# EAGLE board CT_schematic (EAGLE 7.6.0)

Size 100 x 80 mm. Coordinates in mm from the lower left corner, seen from the top.
Outline: 0,0 100,0 100,80 0,80 0,0
Copper layers (1*16): Top 0.035mm / dielectric 1.5mm / Bottom 0.035mm
Design rules "default": minimum track width 10mil, minimum drill 24mil, track to track 8mil, track to pad 8mil, pad to pad 8mil, via to via 8mil, smd to smd 8mil, copper to edge 40mil, drill to drill 8mil, minimum pad ring 10mil, minimum via ring 8mil, stop-mask expansion 4mil, vias tented up to drill 0mil, thermal gap 10mil

## Footprints (pad centres in the part's own frame; a part is rotated, then mirrored left to right if it is on the bottom)
C0603 = smd 0.8 x 0.8: 1 -0.762,0; 2 0.762,0
C0402 = smd 0.5 x 0.5: 1 -0.508,0; 2 0.508,0
C1210 = smd 1.2 x 2.5: 1 -1.524,0; 2 1.524,0
C0805 = smd 1.2 x 1.3: 1 -1.016,0; 2 1.016,0
2220 = smd 1.85 x 5.5: 1 -2.55,0; 2 2.55,0
R0603 = smd 0.8 x 0.8: 1 -0.762,0; 2 0.762,0
EXV-9H = smd 3.505 x 1.676: 1 -2.857,0; 2 2.857,0
L0603 = smd 0.8 x 0.8: 1 -0.762,0; 2 0.762,0
DR1040 = smd 1.6 x 3.2: 1 -4.458,0; 2 4.458,0
PJ-037B_PACKAGE = drill 3.7 square: 1 12,0 | drill 3.2 square: 2 6,0
WLCSP64 = smd 0.34 x 0.34: A1 -1.75,1.75; A2 -1.25,1.75; A3 -0.75,1.75; A4 -0.25,1.75; A5 0.25,1.75; A6 0.75,1.75; A7 1.25,1.75; A8 1.75,1.75; B1 -1.75,1.25; B2 -1.25,1.25; B3 -0.75,1.25; B4 -0.25,1.25; B5 0.25,1.25; B6 0.75,1.25; B7 1.25,1.25; B8 1.75,1.25; C1 -1.75,0.75; C2 -1.25,0.75; C3 -0.75,0.75; C4 -0.25,0.75; C5 0.25,0.75; C6 0.75,0.75; C7 1.25,0.75; C8 1.75,0.75; D1 -1.75,0.25; D2 -1.25,0.25; D3 -0.75,0.25; D4 -0.25,0.25; D5 0.25,0.25; D6 0.75,0.25; D7 1.25,0.25; D8 1.75,0.25; E1 -1.75,-0.25; E2 -1.25,-0.25; E3 -0.75,-0.25; E4 -0.25,-0.25; E5 0.25,-0.25; E6 0.75,-0.25; E7 1.25,-0.25; E8 1.75,-0.25; F1 -1.75,-0.75; F2 -1.25,-0.75; F3 -0.75,-0.75; F4 -0.25,-0.75; F5 0.25,-0.75; F6 0.75,-0.75; F7 1.25,-0.75; F8 1.75,-0.75; G1 -1.75,-1.25; G2 -1.25,-1.25; G3 -0.75,-1.25; G4 -0.25,-1.25; G5 0.25,-1.25; G6 0.75,-1.25; G7 1.25,-1.25; G8 1.75,-1.25; H1 -1.75,-1.75; H2 -1.25,-1.75; H3 -0.75,-1.75; H4 -0.25,-1.75; H5 0.25,-1.75; H6 0.75,-1.75; H7 1.25,-1.75; H8 1.75,-1.75
SOIC-8 = smd 1.6 x 0.6: 1 -2.7,1.905 | smd 1.55 x 0.6: 2 -2.7,0.635; 3 -2.7,-0.635; 4 -2.7,-1.905; 5 2.7,-1.905; 6 2.7,-0.635; 7 2.7,0.635; 8 2.7,1.905
182-009-MALE = drill 1.194 pad 1.524 octagon: 1 -5.537,10.923; 2 -2.769,10.923; 3 0,10.923; 4 2.769,10.923; 5 5.537,10.923; 6 -4.153,8.08; 7 -1.384,8.08; 8 1.384,8.08; 9 4.153,8.08 | hole 3.048: -12.446,9.501; 12.446,9.501
QFN-32 = smd 0.6 x 0.3: 1 -2.3,1.75; 2 -2.3,1.25; 3 -2.3,0.75; 4 -2.3,0.25; 5 -2.3,-0.25; 6 -2.3,-0.75; 7 -2.3,-1.25; 8 -2.3,-1.75; 17 2.3,-1.75; 18 2.3,-1.25; 19 2.3,-0.75; 20 2.3,-0.25; 21 2.3,0.25; 22 2.3,0.75; 23 2.3,1.25; 24 2.3,1.75 | smd 0.3 x 0.6: 9 -1.75,-2.3; 10 -1.25,-2.3; 11 -0.75,-2.3; 12 -0.25,-2.3; 13 0.25,-2.3; 14 0.75,-2.3; 15 1.25,-2.3; 16 1.75,-2.3; 25 1.75,2.3; 26 1.25,2.3; 27 0.75,2.3; 28 0.25,2.3; 29 -0.25,2.3; 30 -0.75,2.3; 31 -1.25,2.3; 32 -1.75,2.3 | smd 3.2 x 3.2: EXP 0,0
SJ-43515TS-SMT-TR = smd 2.2 x 3: 1 0.6,-7.4; 4 3.4,-7.4 | smd 3 x 3: 2 12.8,-7.4; 5 17,-3 | smd 2 x 3: 3 5.3,0; 6 2.5,0 | drill 1.8: P$7 4.5,-3.69; P$8 11.54,-3.69
WM-64PC = drill 0.6 pad 1: 1 -1,0.95; 2 -1,-0.95
TSSOP20-I = smd 0.4 x 1.35: 1 -2.925,-2.875; 2 -2.275,-2.875; 3 -1.625,-2.875; 4 -0.975,-2.875; 5 -0.325,-2.875; 6 0.325,-2.875; 7 0.975,-2.875; 8 1.625,-2.875; 9 2.275,-2.875; 10 2.925,-2.875; 11 2.925,2.875; 12 2.275,2.875; 13 1.625,2.875; 14 0.975,2.875; 15 0.325,2.875; 16 -0.325,2.875; 17 -0.975,2.875; 18 -1.625,2.875; 19 -2.275,2.875; 20 -2.925,2.875
QFN-28 = smd 0.813 x 0.305: 1 -2.451,1.5; 2 -2.451,1; 3 -2.451,0.5; 4 -2.451,0; 5 -2.451,-0.5; 6 -2.451,-1; 7 -2.451,-1.5; 15 2.451,-1.5; 16 2.451,-1; 17 2.451,-0.5; 18 2.451,0; 19 2.451,0.5; 20 2.451,1; 21 2.451,1.5 | smd 0.305 x 0.813: 8 -1.5,-2.451; 9 -1,-2.451; 10 -0.5,-2.451; 11 0,-2.451; 12 0.5,-2.451; 13 1,-2.451; 14 1.5,-2.451; 22 1.5,2.451; 23 1,2.451; 24 0.5,2.451; 25 0,2.451; 26 -0.5,2.451; 27 -1,2.451; 28 -1.5,2.451 | smd 3.607 x 3.607: 29 0,0
ABS07-32.768KHZ-7-T = smd 1.1 x 2.4: 1 -2.5,0; 2 0,0
ABLS-12.288MHZ-B4-T = smd 5.6 x 2.8: 1 -3.81,0; 2 5.69,0
ASFL1 = smd 1.7 x 1.5: 1 -1.27,-1.1; 2 1.27,-1.1; 3 1.27,1.1; 4 -1.27,1.1
WSON-8 = smd 0.3 x 0.6: 1 -0.75,0; 2 0.05,0; 3 0.85,0; 4 1.65,0; 5 1.65,3.8; 6 0.85,3.8; 7 0.05,3.8; 8 -0.75,3.8 | smd 3 x 2.6: PAD 0.45,1.9
QFN-16_EP = smd 0.805 x 0.3: 1 -1.452,0.75; 2 -1.452,0.25; 3 -1.452,-0.25; 4 -1.452,-0.75; 9 1.452,-0.75; 10 1.452,-0.25; 11 1.452,0.25; 12 1.452,0.75 | smd 0.3 x 0.805: 5 -0.75,-1.452; 6 -0.25,-1.452; 7 0.25,-1.452; 8 0.75,-1.452; 13 0.75,1.452; 14 0.25,1.452; 15 -0.25,1.452; 16 -0.75,1.452 | smd 1.55 x 1.55: 17 0,0
SON-6 = smd 0.55 x 0.3: 1 -0.355,0.5 | smd 0.52 x 0.3: 2 -0.37,0; 3 -0.37,-0.5; 4 0.37,-0.5; 5 0.37,0; 6 0.37,0.5
SW_4-1437565-2 = smd 1.4 x 2.1: 1 -2.23,4.55; 2 -2.23,-4.55; 3 2.23,4.55; 4 2.23,-4.55
LGM67K-G1J2-24-Z = smd 0.8 x 1.4: A -2,0; C 0,0
NC7SZ125M5X = smd 1.3 x 0.7: 1 -1.3,0.95; 2 -1.3,0; 3 -1.3,-0.95; 4 1.3,-0.95; 5 1.3,0.95

## Placement (x,y rotation side)
C1  1e-06  [C0603]  -78.74,87.63 0 top  (outside the outline)
C2  1e-07  [C0603]  -82.55,87.63 0 top  (outside the outline)
C3  1e-07  [C0603]  -86.36,87.63 0 top  (outside the outline)
C4  1e-07  [C0603]  -90.17,87.63 0 top  (outside the outline)
C5  1e-07  [C0603]  -93.98,87.63 0 top  (outside the outline)
C6  4.7e-06  [C0603]  -74.93,87.63 0 top  (outside the outline)
C7  1e-07  [C0603]  -97.79,87.63 0 top  (outside the outline)
C8  1e-07  [C0603]  -101.6,87.63 0 top  (outside the outline)
C9  1e-08  [C0603]  -15.24,92.71 0 top  (outside the outline)
C10  1e-06  [C0603]  -19.05,92.71 0 top  (outside the outline)
C11  1e-11  [C0402]  -29.21,97.79 0 top  (outside the outline)
C12  1e-11  [C0402]  -33.02,97.79 0 top  (outside the outline)
C13  1e-08  [C0402]  -36.83,97.79 0 top  (outside the outline)
C14  1e-06  [C0603]  -22.86,92.71 0 top  (outside the outline)
C15  1e-06  [C0603]  -26.67,92.71 0 top  (outside the outline)
C16  1e-06  [C0603]  -30.48,92.71 0 top  (outside the outline)
C17  1e-06  [C0603]  -34.29,92.71 0 top  (outside the outline)
C18  1e-06  [C0603]  -38.1,92.71 0 top  (outside the outline)
C19  1e-06  [C0603]  -41.91,92.71 0 top  (outside the outline)
C20  1e-06  [C0603]  -45.72,92.71 0 top  (outside the outline)
C21  1e-06  [C0603]  -49.53,92.71 0 top  (outside the outline)
C22  1e-06  [C0603]  -53.34,92.71 0 top  (outside the outline)
C23  1e-07  [C0402]  -40.64,97.79 0 top  (outside the outline)
C24  1e-07  [C0402]  -44.45,97.79 0 top  (outside the outline)
C25  1e-07  [C0402]  -48.26,97.79 0 top  (outside the outline)
C26  1e-07  [C0402]  -52.07,97.79 0 top  (outside the outline)
C27  1e-06  [C0603]  -57.15,92.71 0 top  (outside the outline)
C28  1e-07  [C0402]  -55.88,97.79 0 top  (outside the outline)
C29  1e-07  [C0402]  -59.69,97.79 0 top  (outside the outline)
C30  1e-07  [C0402]  -63.5,97.79 0 top  (outside the outline)
C31  1e-07  [C0402]  -67.31,97.79 0 top  (outside the outline)
C32  1e-07  [C0402]  -71.12,97.79 0 top  (outside the outline)
C33  1e-07  [C0402]  -74.93,97.79 0 top  (outside the outline)
C34  2.2e-05  [C1210]  -99.06,74.93 0 top  (outside the outline)
C35  2.2e-05  [C1210]  -16.51,82.55 0 top  (outside the outline)
C36  1e-09  [C0402]  -78.74,97.79 0 top  (outside the outline)
C37  1e-09  [C0402]  -82.55,97.79 0 top  (outside the outline)
C38  1e-07  [C0402]  -86.36,97.79 0 top  (outside the outline)
C39  1e-07  [C0402]  -90.17,97.79 0 top  (outside the outline)
C40  1e-07  [C0402]  -93.98,97.79 0 top  (outside the outline)
C41  1e-07  [C0402]  -97.79,97.79 0 top  (outside the outline)
C42  1e-07  [C0402]  -101.6,97.79 0 top  (outside the outline)
C43  1e-05  [C0805]  -40.64,81.28 0 top  (outside the outline)
C44  1e-05  [C0805]  -45.72,81.28 0 top  (outside the outline)
C45  1e-05  [C0805]  -50.8,81.28 0 top  (outside the outline)
C46  1e-05  [C0805]  -55.88,81.28 0 top  (outside the outline)
C47  1e-05  [C0805]  -60.96,81.28 0 top  (outside the outline)
C48  2.2e-11  [C0402]  -21.59,97.79 0 top  (outside the outline)
C49  2.2e-11  [C0402]  -25.4,97.79 0 top  (outside the outline)
C50  1e-08  [C0402]  -15.24,102.87 0 top  (outside the outline)
C51  1e-08  [C0402]  -19.05,102.87 0 top  (outside the outline)
C52  1e-08  [C0402]  -22.86,102.87 0 top  (outside the outline)
C53  1e-05  [C1210]  -22.86,82.55 0 top  (outside the outline)
C54  1e-05  [C0805]  -66.04,81.28 0 top  (outside the outline)
C55  1e-05  [C0805]  -71.12,81.28 0 top  (outside the outline)
C56  1e-06  [C0603]  -60.96,92.71 0 top  (outside the outline)
C57  1e-07  [C0402]  -26.67,102.87 0 top  (outside the outline)
C58  6.8e-05  [2220]  -100.33,55.88 0 top  (outside the outline)
C59  8e-07  [R0603]  -64.77,92.71 0 top  (outside the outline)
C60  1e-05  [C1210]  -29.21,82.55 0 top  (outside the outline)
C61  1e-07  [C0402]  -30.48,102.87 0 top  (outside the outline)
C62  0.0001  [EXV-9H]  -17.78,74.93 0 top  (outside the outline)
C63  0.0001  [EXV-9H]  -29.21,74.93 0 top  (outside the outline)
C64  1e-08  [C0402]  -34.29,102.87 0 top  (outside the outline)
F1  240.0  [L0603]  -68.58,92.71 0 top  (outside the outline)
I1  7e-06  [DR1040]  -34.29,55.88 0 top  (outside the outline)
J1  PJ-037B  [PJ-037B_PACKAGE]  -83.82,43.18 0 top  (outside the outline)
R2  1000.0  [R0603]  -72.39,92.71 0 top  (outside the outline)
R4  4700.0  [R0603]  -76.2,92.71 0 top  (outside the outline)
R5  10000.0  [R0603]  -20.32,87.63 0 top  (outside the outline)
R6  10000.0  [R0603]  -25.4,87.63 0 top  (outside the outline)
R7  10000.0  [R0603]  -30.48,87.63 0 top  (outside the outline)
R8  10000.0  [R0603]  -35.56,87.63 0 top  (outside the outline)
R9  120.0  [R0603]  -80.01,92.71 0 top  (outside the outline)
R10  1270.0  [R0603]  -83.82,92.71 0 top  (outside the outline)
R11  1270.0  [R0603]  -87.63,92.71 0 top  (outside the outline)
R12  47000.0  [R0603]  -40.64,87.63 0 top  (outside the outline)
R13  47000.0  [R0603]  -45.72,87.63 0 top  (outside the outline)
R14  47000.0  [R0603]  -50.8,87.63 0 top  (outside the outline)
R15  680.0  [R0603]  -91.44,92.71 0 top  (outside the outline)
R16  100000.0  [R0603]  -76.2,81.28 0 top  (outside the outline)
R17  200.0  [R0603]  -95.25,92.71 0 top  (outside the outline)
R18  1000.0  [R0603]  -99.06,92.71 0 top  (outside the outline)
R19  20000.0  [R0603]  -55.88,87.63 0 top  (outside the outline)
R20  91000.0  [R0603]  -60.96,87.63 0 top  (outside the outline)
R21  300000.0  [R0603]  -81.28,81.28 0 top  (outside the outline)
R22  100000.0  [R0603]  -86.36,81.28 0 top  (outside the outline)
R23  300000.0  [R0603]  -91.44,81.28 0 top  (outside the outline)
R24  100000.0  [R0603]  -96.52,81.28 0 top  (outside the outline)
R25  10000.0  [R0603]  -66.04,87.63 0 top  (outside the outline)
R26  10000.0  [R0603]  -71.12,87.63 0 top  (outside the outline)
R27  9100.0  [R0603]  -102.87,92.71 0 top  (outside the outline)
R28  680000.0  [R0603]  -101.6,81.28 0 top  (outside the outline)
R29  120000.0  [R0603]  -15.24,87.63 0 top  (outside the outline)
U1  stm32f091rcy6  [WLCSP64]  -95.25,66.04 0 top  (outside the outline)
U2  AT25040B-SSHL-T  [SOIC-8]  -77.47,55.88 0 top  (outside the outline)
U3  MCP2562-E/SN  [SOIC-8]  -91.44,55.88 0 top  (outside the outline)
U4  182-009-113R531  [182-009-MALE]  -36.83,6.35 0 top  (outside the outline)
U5  SGTL5000XNAA3  [QFN-32]  -60.96,55.88 0 top  (outside the outline)
U6  SJ-43515TS-SMT-TR  [SJ-43515TS-SMT-TR]  -39.37,31.75 0 top  (outside the outline)
U7  SJ-43515TS-SMT-TR  [SJ-43515TS-SMT-TR]  -67.31,31.75 0 top  (outside the outline)
U8  SJ-43515TS-SMT-TR  [SJ-43515TS-SMT-TR]  -95.25,31.75 0 top  (outside the outline)
U9  WM-64PCT  [WM-64PC]  -46.99,55.88 0 top  (outside the outline)
U10  SP3203ECY-L/TR  [TSSOP20-I]  -24.13,55.88 0 top  (outside the outline)
U11  182-009-113R531  [182-009-MALE]  -76.2,6.35 0 top  (outside the outline)
U12  WM8731CLSEFL  [QFN-28]  -91.44,74.93 0 top  (outside the outline)
U13  SJ-43515TS-SMT-TR  [SJ-43515TS-SMT-TR]  -39.37,45.72 0 top  (outside the outline)
U14  SJ-43515TS-SMT-TR  [SJ-43515TS-SMT-TR]  -67.31,45.72 0 top  (outside the outline)
U15  ABS07-32.768KHZ-7-T  [ABS07-32.768KHZ-7-T]  -69.85,74.93 0 top  (outside the outline)
U16  ABLS-12.288MHZ-B4-T  [ABLS-12.288MHZ-B4-T]  -46.99,74.93 0 top  (outside the outline)
U17  ASFL-24.57MHZ-NCS  [ASFL1]  -66.04,66.04 0 top  (outside the outline)
U18  ASFL1-25MHZ-NCS  [ASFL1]  -82.55,66.04 0 top  (outside the outline)
U19  LP3878SDX-ADJ/NOPB  [WSON-8]  -30.48,64.77 0 top  (outside the outline)
U20  LTC3601EUD#PBF  [QFN-16_EP]  -15.24,97.79 0 top  (outside the outline)
U21  LP2951ACSDX/NOPB  [WSON-8]  -48.26,64.77 0 top  (outside the outline)
U22  TPS3895ADRYR  [SON-6]  -36.83,101.6 0 top  (outside the outline)
U23  4-1437565-2  [SW_4-1437565-2]  -100.33,43.18 0 top  (outside the outline)
U24  Q65110A2395  [LGM67K-G1J2-24-Z]  -78.74,74.93 0 top  (outside the outline)
U25  nc7sz125m5x  [NC7SZ125M5X]  -34.29,81.28 0 top  (outside the outline)

## Library data of the parts
C1-C64 F1 I1 J1 R2 R4-R29 U1-U25 = circuit_tree

## Nets
CLK_CRYSTAL_U1_C7: C11.1 U1.C7 U15.1
CLK_CRYSTAL_U1_C8: C12.1 U1.C8 U15.2
CLK_CRYSTAL_U12_1: C48.1 U12.1 U16.1
CLK_CRYSTAL_U12_2: C49.1 U12.2 U16.2
CLK_U1_D8: U1.D8 U18.3
CLK_U5_21: U5.21 U17.3
GND: C1.2 C2.2 C3.2 C4.2 C5.2 C6.2 C7.2 C8.2 C9.2 C10.2 C11.2 C12.2 C13.2 C14.2 C15.2 C23.2 C24.2 C25.2 C26.2 C27.2 C28.2 C29.2 C32.2 C33.2 C37.2 C38.2 C39.2 C40.2 C41.2 C42.2 C43.2 C44.2 C45.2 C46.2 C47.2 C48.2 C49.2 C50.2 C51.2 C52.2 C53.2 C54.2 C55.2 C56.2 C58.1 C58.2 C59.2 C60.2 C61.2 C62.2 C63.2 C64.2 J1.2 R2.2 R5.2 R11.2 R12.2 R13.2 R14.2 R18.2 R19.2 R21.2 R24.2 R27.2 R29.2 U1.A7 U1.B2 U1.G7 U1.G8 U1.H2 U2.4 U3.2 U3.8 U4.5 U5.1 U5.3 U5.7 U5.EXP U7.1 U8.1 U9.2 U10.18 U11.5 U12.4 U12.15 U12.19 U12.25 U12.26 U12.29 U13.1 U14.1 U17.2 U18.2 U19.3 U19.PAD U20.1 U20.9 U20.17 U21.3 U21.4 U21.PAD U22.2 U24.C U25.1 U25.3
NET_U1_C6: R5.1 U1.C6
NET_U1_D7: R4.1 U1.D7 U25.4
NET_U1_H5: U24.A
NET_U1_H7: U23.3 U23.4
NET_U1_H8: C9.1 C10.1 F1.1 U1.H8
NET_U2_3: R6.1 U2.3
NET_U2_7: R8.1 U2.7
NET_U3_6: R9.2 U3.6
NET_U4_2: R9.2 U3.6 U4.2
NET_U4_3: R9.1 U3.7 U4.3
NET_U5_10: C26.1 U5.10
NET_U5_29: R10.1 U5.29
NET_U5_31: R11.1 U5.31
NET_U6_1: U5.4 U6.1
NET_U6_2: U5.2 U6.2
NET_U6_5: U5.6 U6.5
NET_U7_2: C17.1 U7.2
NET_U7_5: C16.1 U7.5
NET_U7_11: C17.2
NET_U7_12: C16.2
NET_U8_2: C19.1 C20.1 U8.2
NET_U8_5: C18.1 U8.5
NET_U8_13: C19.2 C20.2
NET_U8_14: C18.2
NET_U9_1: C21.1 C22.1 C27.1 U5.16 U9.1
NET_U9_15: C21.2 C22.2
NET_U10_1: C30.1 U10.1
NET_U10_2: C32.1 U10.2
NET_U10_3: C30.2 U10.3
NET_U10_4: C31.1 U10.4
NET_U10_5: C31.2 U10.5
NET_U10_6: C33.1 U10.6
NET_U10_20: U10.20
NET_U11_2: U10.14 U11.2
NET_U11_3: U10.17 U11.3
NET_U11_7: U10.13 U11.7
NET_U11_8: U10.16 U11.8
NET_U12_9: U12.9
NET_U12_20: C42.1 C47.1 U12.20
NET_U13_2: C35.1 R13.1 U13.2
NET_U13_5: C34.1 R12.1 U13.5
NET_U13_13: C34.2
NET_U13_14: C35.2
NET_U14_5: C36.1 C37.1 R14.1 R15.1 U14.5
NET_U14_21: R15.2
NET_U14_22: C36.2
NET_U19_1: C52.1 U19.1
NET_U19_6: R17.2 R18.1 U19.6
NET_U19_8: R16.1 U19.8
NET_U20_3: C57.2 I1.1 U20.3 U20.4
NET_U20_6: C57.1 U20.6
NET_U20_7: C56.1 U20.7 U20.12
NET_U20_10: R21.1 U20.10
NET_U20_11: R19.1 R20.1 U20.11
NET_U20_14: U20.14
NET_U20_ATNET_3: I1.2 R20.2
NET_U21_5: R22.1 U21.5
NET_U21_7: R23.2 R24.1 U21.7
NET_U22_1: R26.1 R27.1 U22.1
NET_U22_3: R28.2 R29.1 U22.3
NET_U22_4: R25.1 U22.4 U25.2
NET_U23_1: R2.1 U23.1 U23.2
PROC_CAN_RX: U1.A6 U3.4
PROC_CAN_TX: U1.B6 U3.1
PROC_I2S1_CK: U1.F5 U12.7
PROC_I2S1_SD: U1.E4 U12.8
PROC_I2S1_WS: U1.H6 U12.9 U12.11
PROC_I2S2_CK: U1.F2 U5.24
PROC_I2S2_SD: U1.E6 U5.26
PROC_I2S2_WS: U1.G2 U5.23
PROC_SPI1_MISO: U1.D5 U2.2
PROC_SPI1_MOSI: U1.C5 U2.5
PROC_SPI1_NSS: R7.1 U1.A2 U2.1
PROC_SPI1_SCK: U1.D4 U2.6
PROC_USART1_CTS: U1.D3 U10.8
PROC_USART1_RTS: U1.B1 U10.10
PROC_USART1_RX: U1.B5 U10.11
PROC_USART1_TX: U1.A5 U10.7
VCC_S1_11V5: C53.1 C55.1 C59.1 C62.1 C63.1 J1.1 R16.2 U19.4 U20.15 U20.16 U21.8
VCC_TIER1_1V2: C23.1 C54.1 R17.1 U5.30 U19.5
VCC_TIER1_3V3: C1.1 C2.1 C3.1 C4.1 C5.1 C6.1 C7.1 C8.1 C13.1 C15.1 C24.1 C25.1 C28.1 C29.1 C38.1 C39.1 C40.1 C41.1 C43.1 C44.1 C45.1 C46.1 C50.1 C51.1 C58.2 C61.1 C64.1 F1.2 I1.2 R4.2 R6.2 R7.2 R8.2 R10.2 R20.2 R25.2 R26.2 R28.1 U1.A1 U1.A8 U1.B8 U1.G6 U1.H1 U2.8 U3.5 U5.5 U5.20 U10.12 U10.19 U12.3 U12.5 U12.12 U12.18 U17.4 U18.4 U20.8 U22.6 U25.5
VCC_TIER1_5V0: C14.1 C60.1 R22.2 R23.1 U3.3 U21.1

## Tracks (layer width: path | path; a pad name or v marks a point on that pad's centre or on a via)
CLK_CRYSTAL_U1_C7  (2 unrouted)
CLK_CRYSTAL_U1_C8  (2 unrouted)
CLK_CRYSTAL_U12_1  (2 unrouted)
CLK_CRYSTAL_U12_2  (2 unrouted)
CLK_U1_D8  (1 unrouted)
CLK_U5_21  (1 unrouted)
GND  (104 unrouted)
NET_U1_C6  (1 unrouted)
NET_U1_D7  (2 unrouted)
NET_U1_H7  (1 unrouted)
NET_U1_H8  (3 unrouted)
NET_U2_3  (1 unrouted)
NET_U2_7  (1 unrouted)
NET_U3_6  (1 unrouted)
NET_U4_2  (2 unrouted)
NET_U4_3  (2 unrouted)
NET_U5_10  (1 unrouted)
NET_U5_29  (1 unrouted)
NET_U5_31  (1 unrouted)
NET_U6_1  (1 unrouted)
NET_U6_2  (1 unrouted)
NET_U6_5  (1 unrouted)
NET_U7_2  (1 unrouted)
NET_U7_5  (1 unrouted)
NET_U8_2  (2 unrouted)
NET_U8_5  (1 unrouted)
NET_U8_13  (1 unrouted)
NET_U9_1  (4 unrouted)
NET_U9_15  (1 unrouted)
NET_U10_1  (1 unrouted)
NET_U10_2  (1 unrouted)
NET_U10_3  (1 unrouted)
NET_U10_4  (1 unrouted)
NET_U10_5  (1 unrouted)
NET_U10_6  (1 unrouted)
NET_U11_2  (1 unrouted)
NET_U11_3  (1 unrouted)
NET_U11_7  (1 unrouted)
NET_U11_8  (1 unrouted)
NET_U12_20  (2 unrouted)
NET_U13_2  (2 unrouted)
NET_U13_5  (2 unrouted)
NET_U14_5  (4 unrouted)
NET_U19_1  (1 unrouted)
NET_U19_6  (2 unrouted)
NET_U19_8  (1 unrouted)
NET_U20_3  (3 unrouted)
NET_U20_6  (1 unrouted)
NET_U20_7  (2 unrouted)
NET_U20_10  (1 unrouted)
NET_U20_11  (2 unrouted)
NET_U20_ATNET_3  (1 unrouted)
NET_U21_5  (1 unrouted)
NET_U21_7  (2 unrouted)
NET_U22_1  (2 unrouted)
NET_U22_3  (2 unrouted)
NET_U22_4  (2 unrouted)
NET_U23_1  (2 unrouted)
PROC_CAN_RX  (1 unrouted)
PROC_CAN_TX  (1 unrouted)
PROC_I2S1_CK  (1 unrouted)
PROC_I2S1_SD  (1 unrouted)
PROC_I2S1_WS  (2 unrouted)
PROC_I2S2_CK  (1 unrouted)
PROC_I2S2_SD  (1 unrouted)
PROC_I2S2_WS  (1 unrouted)
PROC_SPI1_MISO  (1 unrouted)
PROC_SPI1_MOSI  (1 unrouted)
PROC_SPI1_NSS  (2 unrouted)
PROC_SPI1_SCK  (1 unrouted)
PROC_USART1_CTS  (1 unrouted)
PROC_USART1_RTS  (1 unrouted)
PROC_USART1_RX  (1 unrouted)
PROC_USART1_TX  (1 unrouted)
VCC_S1_11V5  (10 unrouted)
VCC_TIER1_1V2  (4 unrouted)
VCC_TIER1_3V3  (57 unrouted)
VCC_TIER1_5V0  (5 unrouted)